# Altium PCB PCB3.PcbDoc
Units mil, origin at the board's own origin, x right, y up, seen from the top; angles counter-clockwise.
Board outline 6000 x 4000 mil, 2 copper layers (Top Layer, Bottom Layer); 27 components, 27 nets, 160 pads, 0 vias.
Unrouted connection lines stored in the file: 75.
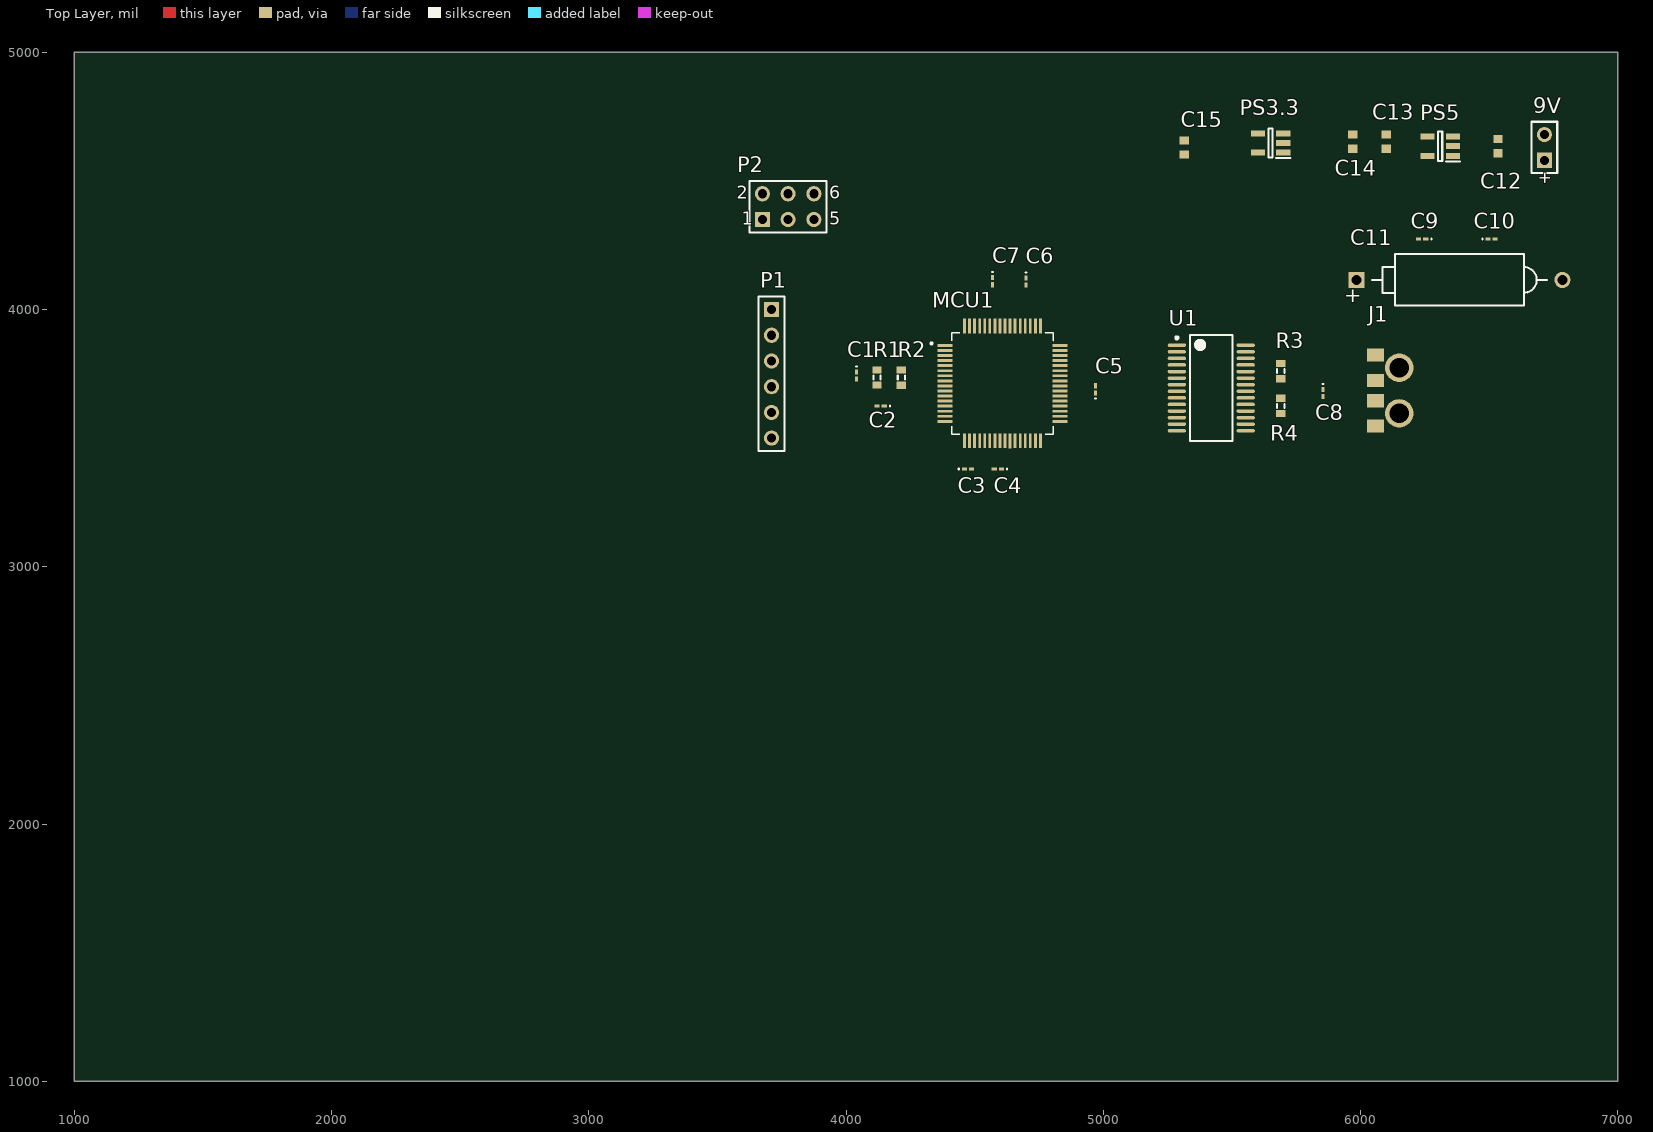
[diagram p0: Top Layer view]
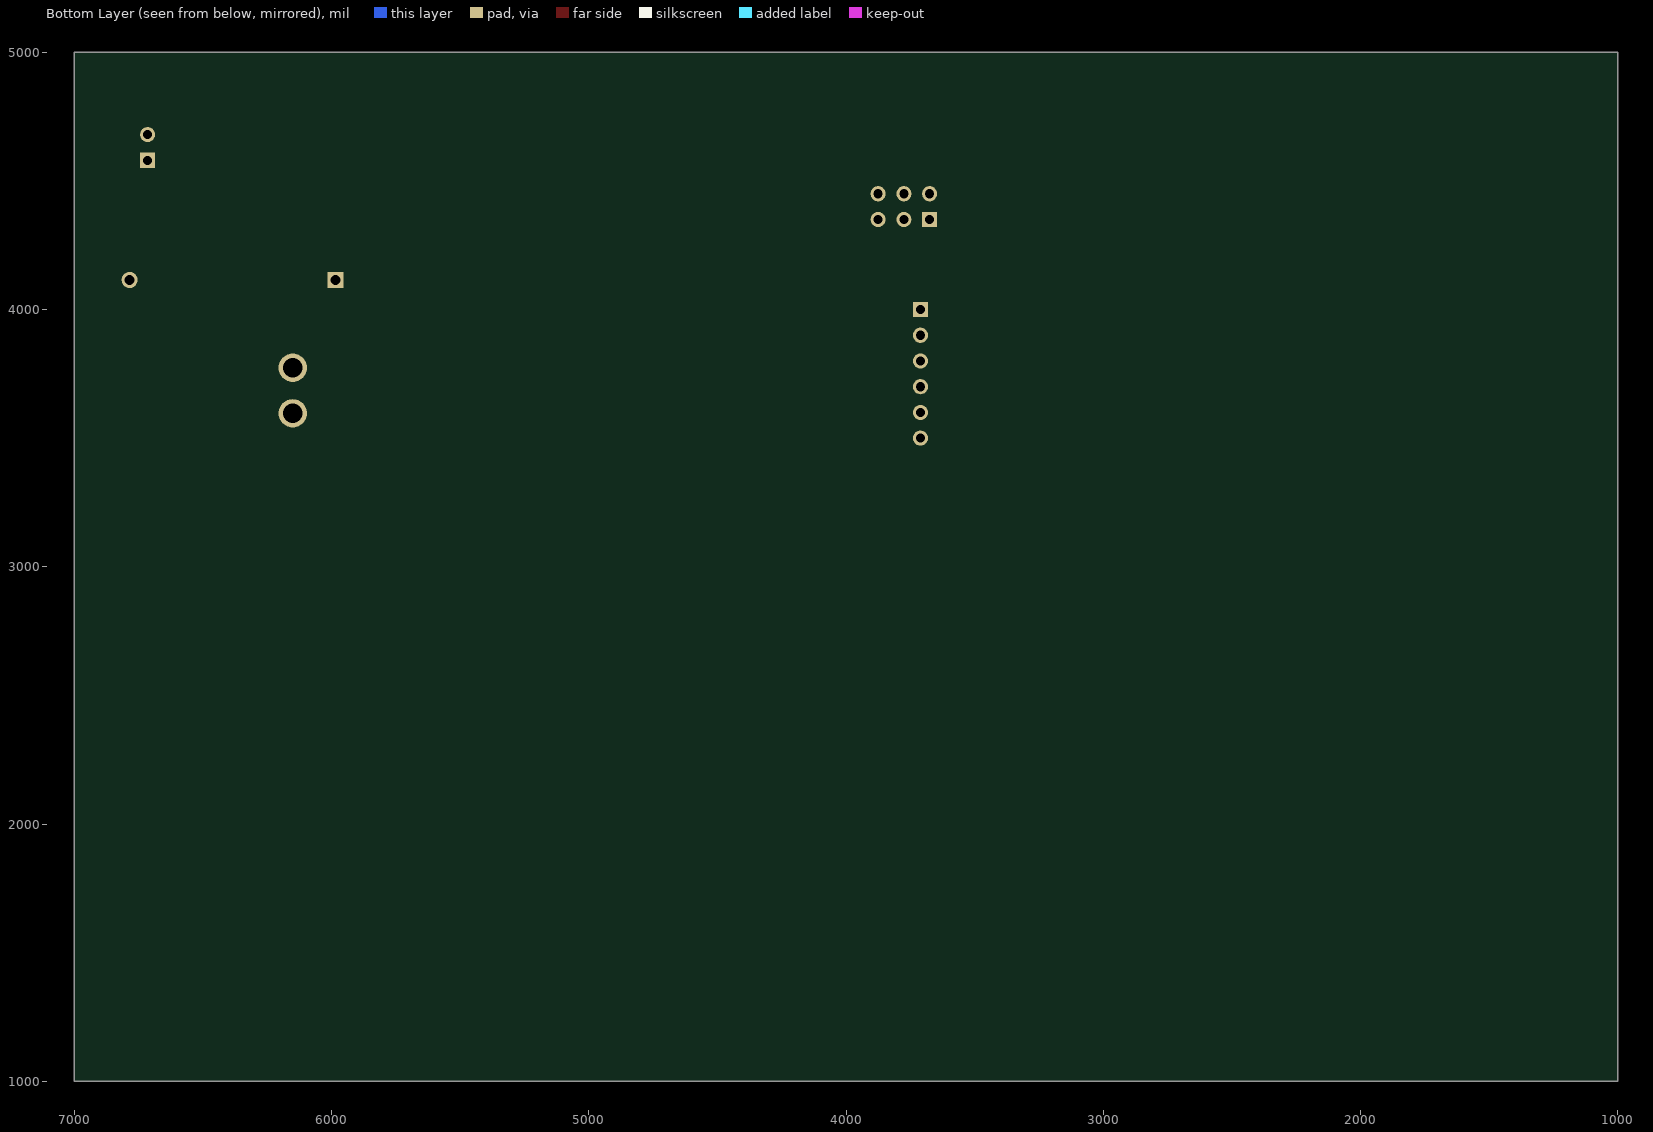
[diagram p1: Bottom Layer view, seen from below]

## Layer stack, top to bottom
Top Solder: solder mask 0.4, Solder Resist, Dk 3.5
Top Layer: signal copper 1.4
Dielectric 1: dielectric 12.6, FR-4, Dk 4.8
Bottom Layer: signal copper 1.4
Bottom Solder: solder mask 0.4, Solder Resist, Dk 3.5

## Board outline
1000,1000 7000,1000 7000,5000 1000,5000

## Design rules (kind name [scope] priority, off if disabled: settings)
Clearance [All] p1: gap=10 ignorepadtopadclearanceinfootprint=FALSE except(0: Arc-Hole Track-Hole SMDPad-Hole THPad-Hole Via-Hole Fill-Hole Poly-Hole Region-Hole Text-Hole)
PolygonConnect [All] p1: connectstyle=Relief reliefconductorwidth=10 reliefentries=4 polygonreliefangle="90 Angle" airgapwidth=10
RoomDefinition Power [InComponentClass('Power')] p1: confinementstyle=ConfineIn formatcopy=TRUE lockcomponents=FALSE outline 1445,1430 3445,1430 3445,2430 1445,2430
RoomDefinition MCU [InComponentClass('MCU')] p2: confinementstyle=ConfineIn formatcopy=TRUE lockcomponents=FALSE outline 1400,2945 3400,2945 3400,3780 1400,3780
RoutingVias [All] p1: holewidth=28 width=50 viastyle="Through Hole" minholewidth=28 minwidth=50 maxholewidth=28 maxwidth=50
SolderMaskExpansion [All] p1: expansion=4
Width [All] p1: maxlimit=10 minlimit=10 preferedwidth=10
30 further rules are at their usual default settings.

## Classes and differential pairs
component class Power: 9V C13 C14 C15 PS3.3 PS5
component class MCU: C1 C2 C3 C4 C5 C6 C7 C8 C9 C10 C11 J1 MCU1 P1 P2 R1 R2 R3 R4 U1

## Components (designator, comment, footprint, x,y, rotation, side; value= is the part's Value field where it differs from the comment)
9V "Battery" BAT-2 6715,4630 r90 top
C1 "0.1u" 0603 4040,3743.78 r270 top
C2 "0.1u" 0603 4135,3625 r180 top
C3 "0.1u" 0603 4473.78,3380 r0 top
C4 "0.1u" 0603 4590,3380 r180 top
C5 "0.1u" 0603 4970,3690 r90 top
C6 "10u" 0603 4700,4108.78 r270 top
C7 "0.1u" 0603 4570,4110 r270 top
C8 "100nF" 0603 5855,3675 r270 top
C9 "100nF" 0603 6240,4275 r180 top
C10 "100nF" 0603 6510,4275 r0 top
C11 "Cap Pol2" POLAR0.8 6385,4115 r180 top value=4.7uF
C12 "Cap Tan" 1608[0603] 6535,4635 r270 top value=1uF
C13 "Cap Tan" 1608[0603] 6100,4652.56 r90 top value=1uF
C14 "Cap Tan" 1608[0603] 5970,4652.56 r270 top value=1uF
C15 "1uF" 1608[0603] 5315,4630 r90 top value=10uF
J1 "629004113921" 629004113921 6460,3685 r90 top
MCU1 "PIC32MX470F512H-I/PT" *QFP50P1200X1200X120-64N 4608.23,3712.95 r0 top
P1 "Header 6" HDR1X6 3710.75,4000 r270 top
P2 "Header 3X2" HDR2X3 3675,4350 r0 top
PS3.3 "MCP1754T-3302E_OT" SOT95P270X145-5N 5650.79,4647.4 r180 top
PS5 "MCP1754T-3302E_OT" SOT95P270X145-5N 6310,4635 r180 top
R1 "Res3" J1-0603 4120,3735.47 r90 top value=1K
R2 "Res3" J1-0603 4215,3735 r270 top value=1K
R3 "Res3" J1-0603 5690,3760.47 r270 top value=4.7K
R4 "Res3" J1-0603 5690,3625.47 r270 top value=10K
U1 "FT232RL-Tray" SSOP-28_L 5420,3695 r0 top

## Footprints (in the part's own frame and the unit in brackets; to place one, negate y for a bottom-side part, rotate by r counter-clockwise, add the part's x,y. Pads: shape width x height; smd on the part's side, far side on the other; paste and mask are expansions set on the pad)
0603 [mm] "Chip Inductor, Body 0.6x0.3mm, IPC High Density"
  rect 0.5x0.3 smd: 1(-0.35,0) 2(0.35,0)
  silkscreen extent -0.9,-0.05 -0.9,0.05, body extent -0.33,-0.18 0.33,0.18, height 0.55
1608[0603] [mm] "Chip Capacitor, Body 1.6x0.8mm, IPC High Density"
  rect 0.8x0.9 smd: 1(-0.7,0) 2(0.7,0)
  body extent -0.87,-0.48 0.87,0.48, height 1.3
629004113921 [mm] "USB 2.0 Plug Type A SMT with Clip"
  rect 1.3x1.7 smd: 1(3.5,10.2) 2(1,10.2) 3(-1,10.2) 4(-3.5,10.2)
  round 2.8 hole 1.9: Shell(-2.25,7.85) Shell(2.25,7.85)
  body extent -6,-9.4 6,10.4, height 2.25
*QFP50P1200X1200X120-64N [mm]
  rect 1.47x0.28 smd: 1(-5.67,3.75) 2(-5.67,3.25) 3(-5.67,2.75) 4(-5.67,2.25) 5(-5.67,1.75) 6(-5.67,1.25) 7(-5.67,0.75) 8(-5.67,0.25) 9(-5.67,-0.25) 10(-5.67,-0.75) 11(-5.67,-1.25) 12(-5.67,-1.75) 13(-5.67,-2.25) 14(-5.67,-2.75) 15(-5.67,-3.25) 16(-5.67,-3.75) 33(5.67,-3.75) 34(5.67,-3.25) 35(5.67,-2.75) 36(5.67,-2.25) 37(5.67,-1.75) 38(5.67,-1.25) 39(5.67,-0.75) 40(5.67,-0.25) 41(5.67,0.25) 42(5.67,0.75) 43(5.67,1.25) 44(5.67,1.75) 45(5.67,2.25) 46(5.67,2.75) 47(5.67,3.25) 48(5.67,3.75)
  rect 0.28x1.47 smd: 17(-3.75,-5.67) 18(-3.25,-5.67) 19(-2.75,-5.67) 20(-2.25,-5.67) 21(-1.75,-5.67) 22(-1.25,-5.67) 23(-0.75,-5.67) 24(-0.25,-5.67) 25(0.25,-5.67) 26(0.75,-5.677) 27(1.25,-5.67) 28(1.75,-5.67) 29(2.25,-5.67) 30(2.75,-5.67) 31(3.25,-5.67) 32(3.75,-5.67) 49(3.75,5.67) 50(3.25,5.67) 51(2.75,5.67) 52(2.25,5.67) 53(1.75,5.67) 54(1.25,5.67) 55(0.75,5.67) 56(0.25,5.67) 57(-0.25,5.67) 58(-0.75,5.67) 59(-1.25,5.67) 60(-1.75,5.67) 61(-2.25,5.67) 62(-2.75,5.67) 63(-3.25,5.67) 64(-3.75,5.67)
  silkscreen extent -7.1,-5 5,5
BAT-2 [mm] "Battery; 2 Leads"
  rect 1.5x1.5 hole 0.9: 1(-1.27,0)
  round 1.5 hole 0.9: 2(1.27,0)
  silkscreen extent -2.54,-1.27 2.54,1.27
HDR1X6 [mm] "Connector; Header; 6 Position"
  rect 1.5x1.5 hole 0.9: 1(0,0)
  round 1.5 hole 0.9: 2(2.54,0) 3(5.08,0) 4(7.62,0) 5(10.16,0) 6(12.7,0)
  silkscreen extent -1.27,-1.27 13.97,1.27
HDR2X3 [mm] "Connector; Header; 3x2 Position"
  rect 1.5x1.5 hole 0.9: 1(0,0)
  round 1.5 hole 0.9: 2(0,2.54) 3(2.54,0) 4(2.54,2.54) 5(5.08,0) 6(5.08,2.54)
  silkscreen extent -1.27,-1.27 6.35,3.81
J1-0603 [mm] "Chip Resistor, Body 1.6x0.8mm, IPC High Density"
  rect 0.7x0.9 smd: 1(-0.75,0) 2(0.75,0)
  silkscreen extent -0.2,-0.35 0.2,0.35, body extent -0.85,-0.48 0.85,0.48, height 0.9
POLAR0.8 [mm] "Polarized Capacitor; 2 Leads"
  rect 1.6x1.6 hole 1: 1(10.16,0)
  round 1.6 hole 1: 2(-10.16,0)
  silkscreen extent -8.64,-2.54 8.64,2.54
SOT95P270X145-5N [mm]
  rect 1.4x0.6 smd: 1(-1.25,0.95) 2(-1.25,0) 3(-1.25,-0.95) 4(1.25,-0.95) 5(1.25,0.95)
  silkscreen extent -1.95,-1.45 0.2,1.5, body extent -1.35,-1.45 1.35,1.45, height 1.45
SSOP-28_L [mm] "SOP, 28-Leads, Body 10.2x5.3mm, Pitch 0.65mm, IPC High Density"
  oval 1.8x0.35 smd: 1(-3.4,4.225) 2(-3.4,3.575) 3(-3.4,2.925) 4(-3.4,2.275) 5(-3.4,1.625) 6(-3.4,0.975) 7(-3.4,0.325) 8(-3.4,-0.325) 9(-3.4,-0.975) 10(-3.4,-1.625) 11(-3.4,-2.275) 12(-3.4,-2.925) 13(-3.4,-3.575) 14(-3.4,-4.225) 15(3.4,-4.225) 16(3.4,-3.575) 17(3.4,-2.925) 18(3.4,-2.275) 19(3.4,-1.625) 20(3.4,-0.975) 21(3.4,-0.325) 22(3.4,0.325) 23(3.4,0.975) 24(3.4,1.625) 25(3.4,2.275) 26(3.4,2.925) 27(3.4,3.575) 28(3.4,4.225)
  silkscreen extent -3.52,-5.25 2.1,5.25, body extent -2.8,-5.25 2.8,5.25, height 2

## Part data
9V: "Multicell Battery", LatestRevisionDate=17-Jul-2002, LatestRevisionNote="Re-released for DXP Platform.", PackageDescription="Battery; 2 Leads", PackageReference=BAT-2, Published=24-Mar-1999, Publisher="Altium Limited"
C1 C2 C3 C4 C5 C6 C7 C8 C9 C10: library part C0603, "CER 10UF 25V X8R 1210", Supplier Part Number 1=445-174833-1-ND, Supplier 1=Digi-Key
C11: "Polarized Capacitor (Axial)", LatestRevisionDate=17-Jul-2002, LatestRevisionNote="Re-released for DXP Platform.", PackageDescription="Polarized Capacitor; 2 Leads", PackageReference=POLAR0.8, Published=8-Jun-2000, Publisher="Altium Limited"
C12 C13 C14 C15: library part "Cap Semi", "Capacitor (Semiconductor SIM Model)", LatestRevisionDate=29-May-2009, LatestRevisionNote="IPC-7351 Footprint Added.", PackageDescription="Chip Capacitor", PackageReference=C1206, Published=8-Jun-2000, Publisher="Altium Limited"
J1: library part CMP-1502-03242-1, "USB 2.0 Type A Plug WR-COM, Horizontal, SMT, with Clips", Contact Resistance=20mOhm, Manufacturer="Wurth Elektronik", Operating Temperature=-40to105degC, Rated Current=1.5A, Working Voltage=30VAC, Connector Type=USB2.0TypeA, Datasheet URL=https://katalog.we-online.de/em/datasheet/629004113921.pdf, Gender=Plug, Manufacturer URL=http://www.we-online.de, Mounting Technology=SMT, Orientation=Horizontal, Package Reference=629004113921, Packaging=Tube, Part Number=629004113921, Publisher=WurthElektronik
P1: "Header, 6-Pin", LatestRevisionDate=17-Jul-2002, LatestRevisionNote="Re-released for DXP Platform.", Publisher="Altium Limited"
P2: "Header, 3-Pin, Dual row", LatestRevisionDate=17-Jul-2002, LatestRevisionNote="Re-released for DXP Platform.", Publisher="Altium Limited"
PS3.3 PS5: "Power Supply", Manufacturer_Name=Microchip, Manufacturer_Part_Number=MCP1754T-3302E/OT, Mouser Part Number=579-MCP1754T3302EOT, Allied_Number=70451943, Allied Price/Stock=https://www.alliedelec.com/microchiptechnologyinc-mcp1754t-3302e-ot/70451943/, Datasheet Link=http://ww1.microchip.com/downloads/en/DeviceDoc/20002276C.pdf, Height=1.45mm, Mouser Price/Stock=https://www.mouser.com/Search/Refine.aspx?Keyword=579-MCP1754T3302EOT
R1 R2 R3 R4: "Resistor", LatestRevisionDate=29-May-2009, LatestRevisionNote="IPC-7351 Footprint Added.", PackageDescription="Chip Resistor", PackageReference=J1-0603, Published=8-Jun-2000, Publisher="Altium Limited"
U1: library part CMP-0078-00027-1, "USB UART Asynchronous Serial Data Transfer Chip, SSOP-28, Tray", DatasheetVersion="ver 2.07, Jul-2010", PackageDescription="28-Pin Small Outline Package 0.65 mm Pitch", PackageReference=SSOP-28, PackageVersion=2010

## Nets (pads, with @x,y where several pads share a name; then routed paths per layer and width w, separated by ;. In a path a pad name is that pad's centre, name@x,y a point inside that pad or via, vN(x,y) a via of type N, cw(c..) or ccw(c..) an arc to the next point about the centre after c; other vN are vias at no path point)
+3.3: C15.1 PS3.3.5 U1.4
+3.3V: C2.1 C3.1 C4.1 C5.1 C7.2 MCU1.10 MCU1.19 MCU1.26 MCU1.35 MCU1.38 MCU1.57 P1.2 P2.2 R1.2
+5: C9.1 C10.1 C11.1 C13.1 C14.2 PS3.3.1 PS5.5 U1.20
GND: 9V.2 C1.2 C2.2 C3.2 C4.2 C5.2 C6.1 C7.1 C8.2 C9.2 C10.2 C11.2 C12.1 C13.2 C14.1 C15.2 J1.4 MCU1.9 MCU1.20 MCU1.25 MCU1.41 P1.3 P2.6 PS3.3.2 PS5.2 R4.2 U1.7 U1.18 U1.21 U1.25 U1.26
MCLR: MCU1.7 P1.1 R2.1
Net9V_1: 9V.1 C12.2 PS5.1
NetC1_1: C1.1 R1.1 R2.2
NetC6_2: C6.2 MCU1.56
NetC8_1: C8.1 U1.17
NetJ1_1: J1.1 R3.1
NetJ1_2: J1.2 U1.16
NetJ1_3: J1.3 U1.15
NetR3_2: R3.2 R4.1 U1.19
PGC: MCU1.15 P1.5
PGD: MCU1.16 P1.4
SCK1: MCU1.50
SCK2: MCU1.4 P2.3
SDI1: MCU1.51
SDI2: MCU1.5 P2.1
SDO1: MCU1.52
SDO2: MCU1.6 P2.4
SS1: MCU1.63
SS2: MCU1.8 P2.5
U1CTS: MCU1.30 U1.11
U1RTS: MCU1.29 U1.3
U1RX: MCU1.23 U1.5
U1TX: MCU1.13 U1.1
pads on no net: J1.Shell MCU1.1 MCU1.2 MCU1.3 MCU1.11 MCU1.12 MCU1.14 MCU1.17 MCU1.18 MCU1.21 MCU1.22 MCU1.24 MCU1.27 MCU1.28 MCU1.31 MCU1.32 MCU1.33 MCU1.34 MCU1.36 MCU1.37 MCU1.39 MCU1.40 MCU1.42 MCU1.43 MCU1.44 MCU1.45 MCU1.46 MCU1.47 MCU1.48 MCU1.49 MCU1.53 MCU1.54 MCU1.55 MCU1.58 MCU1.59 MCU1.60 MCU1.61 MCU1.62 MCU1.64 P1.6 PS3.3.3 PS3.3.4 PS5.3 PS5.4 U1.2 U1.6 U1.8 U1.9 U1.10 U1.12 U1.13 U1.14 U1.22 U1.23 U1.24 U1.27 U1.28

## Text inside footprints (layer, text, board x,y; h text height)
9V: Top Overlay "+" at 6737.72,4485.51 h45.28 r90
C11: Top Overlay "+" at 6005,4077.6 h59.06 r180
J1: Mechanical 2 "PCB Edge" at 6280.87,3606.26 h24 r90
P2: Top Overlay "6" at 3935,4430 h50; Top Overlay "5" at 3935,4330 h50; Top Overlay "2" at 3575,4430 h50; Top Overlay "1" at 3595,4330 h50